# EAGLE board demeter_v24 (EAGLE 6.2)
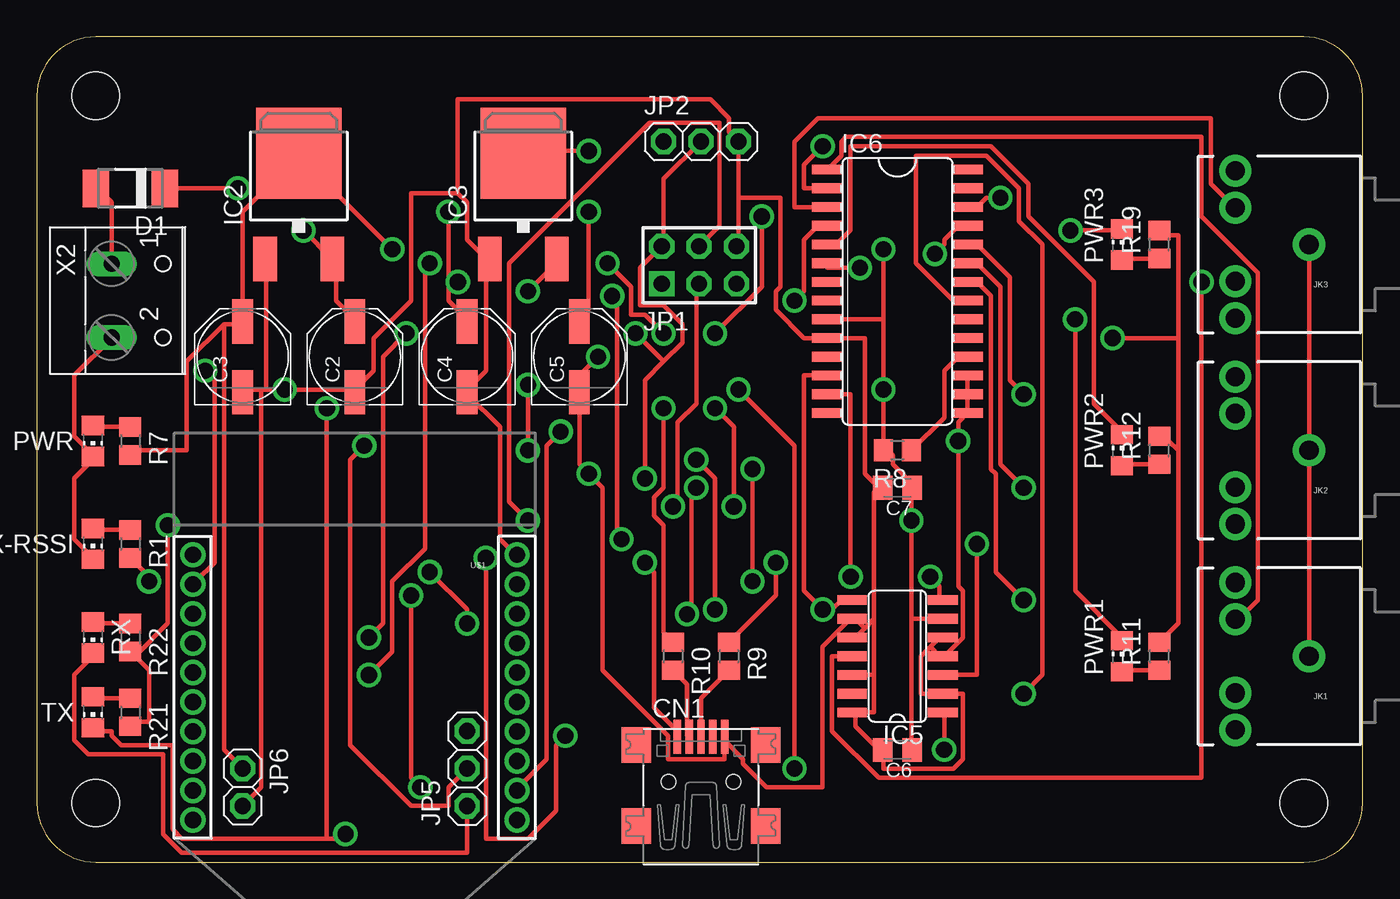
[diagram p0: board, top side]
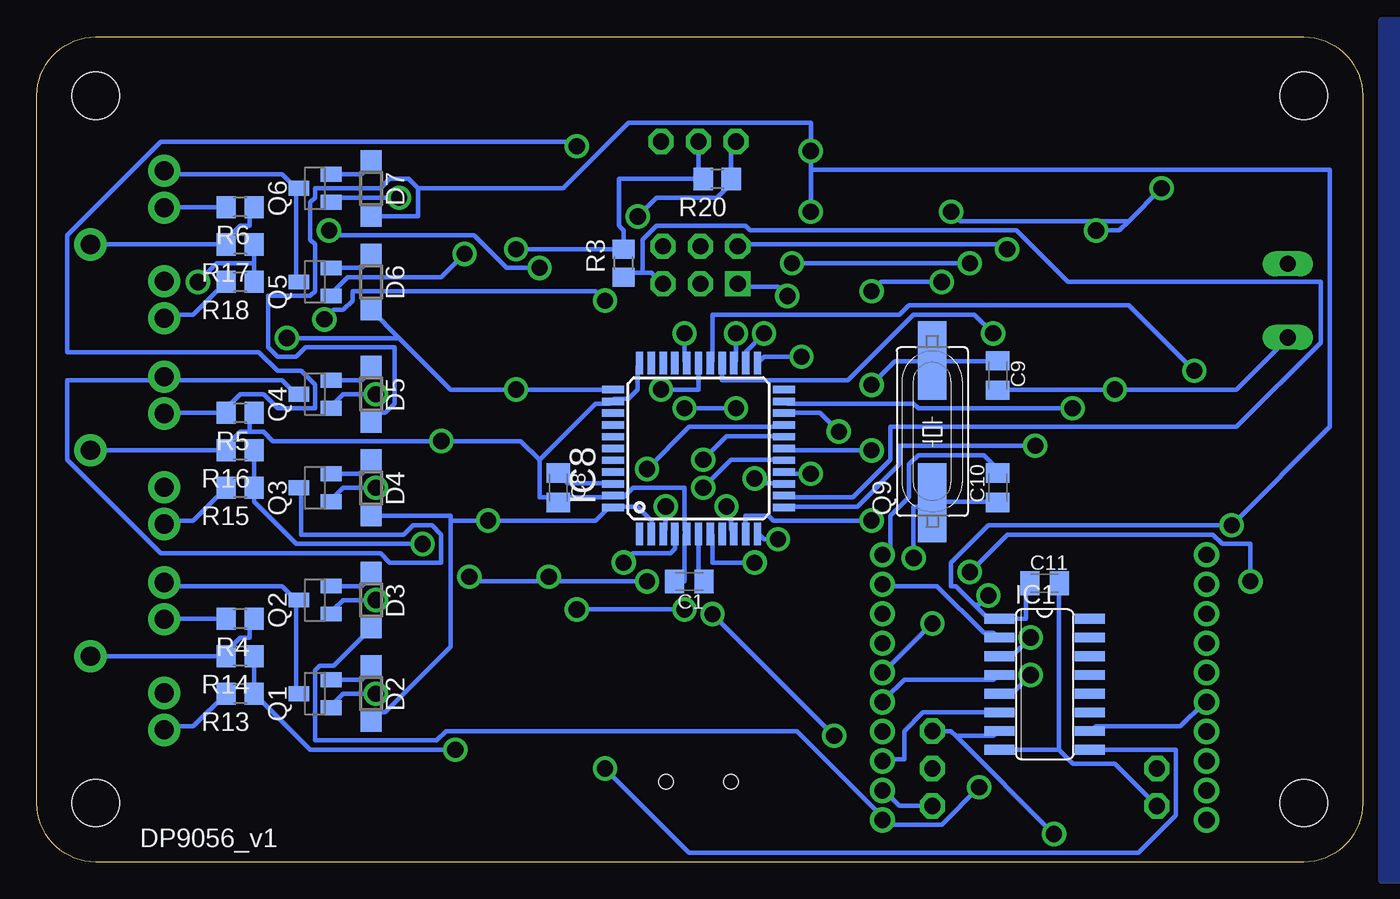
[diagram p1: board, bottom side, seen from below]

Size 90 x 56 mm. Coordinates in mm from the lower left corner, seen from the top.
Copper layers (1*16): Top 0.035mm / dielectric 1.5mm / Bottom 0.035mm
Design rules: minimum track width 12mil, minimum drill 1.1mm, track to track 8mil, track to pad 8mil, pad to pad 8mil, via to via 8mil, smd to smd 8mil, copper to edge 10mil, drill to drill 8mil, minimum pad ring 12mil, minimum via ring 10mil, stop-mask expansion 4mil, vias tented up to drill 25mil, thermal gap 10mil

## Footprints (pad centres in the part's own frame; a part is rotated, then mirrored left to right if it is on the bottom)
C0805K = smd 1.3 x 1.6: 1 -1,0; 2 1,0
PANASONIC_D = smd 3 x 1.4: + 2.4,0; - -2.4,0
USB-MINIB = smd 0.5 x 2.308: D+ 0,4.064; D- -0.8,4.064; GND 1.6,4.064; ID 0.8,4.064; VBUS -1.6,4.064 | smd 2 x 2.4: GND1 -4.4,-2; GND2 -4.4,3.5; GND3 4.4,3.5; GND4 4.4,-2 | hole 1: -2.2,1; 2.2,1
DO-214AC = smd 1.778 x 2.54: A 2.342,0; C -2.342,0
SOD123 = smd 1.4 x 1.4: A 1.9,0; C -1.9,0
SO16 = smd 0.66 x 2.032: 1 -4.445,-3.073; 2 -3.175,-3.073; 3 -1.905,-3.073; 4 -0.635,-3.073; 5 0.635,-3.073; 6 1.905,-3.073; 7 3.175,-3.073; 8 4.445,-3.073; 9 4.445,3.073; 10 3.175,3.073; 11 1.905,3.073; 12 0.635,3.073; 13 -0.635,3.073; 14 -1.905,3.073; 15 -3.175,3.073; 16 -4.445,3.073
DPACK = smd 1.6 x 3: 1 -2.28,-4.8; 3 2.28,-4.8 | smd 5.8 x 6.2: 4 0,2.38
SO14 = smd 2.032 x 0.66: 1 -3.073,3.81; 2 -3.073,2.54; 3 -3.073,1.27; 4 -3.073,0; 5 -3.073,-1.27; 6 -3.073,-2.54; 7 -3.073,-3.81; 8 3.073,-3.81; 9 3.073,-2.54; 10 3.073,-1.27; 11 3.073,0; 12 3.073,1.27; 13 3.073,2.54; 14 3.073,3.81
SO28W = smd 0.66 x 2.032: 1 -7.62,-4.78; 2 -6.35,-4.78; 3 -5.08,-4.78; 4 -3.81,-4.78; 5 -2.54,-4.78; 6 -1.27,-4.78; 7 0,-4.78; 8 1.27,-4.78; 9 2.54,-4.78; 10 3.81,-4.78; 11 5.08,-4.78; 12 6.35,-4.78; 13 7.62,-4.78; 14 8.89,-4.78; 15 8.89,4.78; 16 7.62,4.78; 17 6.35,4.78; 18 5.08,4.78; 19 3.81,4.78; 20 2.54,4.78; 21 1.27,4.78; 22 0,4.78; 23 -1.27,4.78; 24 -2.54,4.78; 25 -3.81,4.78; 26 -5.08,4.78; 27 -6.35,4.78; 28 -7.62,4.78
TQFP44 = smd 1.5 x 0.5: 1 -5.8,4; 2 -5.8,3.2; 3 -5.8,2.4; 4 -5.8,1.6; 5 -5.8,0.8; 6 -5.8,0; 7 -5.8,-0.8; 8 -5.8,-1.6; 9 -5.8,-2.4; 10 -5.8,-3.2; 11 -5.8,-4; 23 5.8,-4; 24 5.8,-3.2; 25 5.8,-2.4; 26 5.8,-1.6; 27 5.8,-0.8; 28 5.8,0; 29 5.8,0.8; 30 5.8,1.6; 31 5.8,2.4; 32 5.8,3.2; 33 5.8,4 | smd 0.5 x 1.5: 12 -4,-5.8; 13 -3.2,-5.8; 14 -2.4,-5.8; 15 -1.6,-5.8; 16 -0.8,-5.8; 17 0,-5.8; 18 0.8,-5.8; 19 1.6,-5.8; 20 2.4,-5.8; 21 3.2,-5.8; 22 4,-5.8; 34 4,5.8; 35 3.2,5.8; 36 2.4,5.8; 37 1.6,5.8; 38 0.8,5.8; 39 0,5.8; 40 -0.8,5.8; 41 -1.6,5.8; 42 -2.4,5.8; 43 -3.2,5.8; 44 -4,5.8
AUDIO-JACK = drill 1.3 pad 2.184: RING 5,5; RSH 5,2.5; SLEEVE 0,0; TIP 5,-5; TSH 5,-2.5
AVR-ISP-6 = drill 1.1 square: 1 -2.54,-1.27 | drill 1.1 octagon: 2 -2.54,1.27; 3 0,-1.27; 4 0,1.27; 5 2.54,-1.27; 6 2.54,1.27
1X03 = drill 1.1 octagon: 1 -2.54,0; 2 0,0; 3 2.54,0
1X02 = drill 1.1 octagon: 1 -1.27,0; 2 1.27,0
CHIP-LED0805 = smd 1.5 x 1.3: A 0,-1.05; C 0,1.05
SOT23 = smd 1 x 1.4: 1 -0.95,-1.1; 2 0.95,-1.1; 3 0,1.1
HC49UP = smd 5.334 x 1.93: 1 -4.826,0; 2 4.826,0
R0805 = smd 1.3 x 1.5: 1 -0.95,0; 2 0.95,0
XBEE-1 = drill 1.1: 1 -11,20; 2 -11,18; 3 -11,16; 4 -11,14; 5 -11,12; 6 -11,10; 7 -11,8; 8 -11,6; 9 -11,4; 10 -11,2; 11 11,2; 12 11,4; 13 11,6; 14 11,8; 15 11,10; 16 11,12; 17 11,14; 18 11,16; 19 11,18; 20 11,20
DP9056_V1 = hole 3.2: 4,4; 86,4; 86,52; 4,52
W237-102 = drill 1.1 long: 1 -2.5,-1.27; 2 2.5,-1.27

## Placement (x,y rotation side)
C1  1uF  [C0805K]  45.72,19.05 180 bottom
C2  22uF  [PANASONIC_D]  21.59,34.29 90 top
C3  100uF  [PANASONIC_D]  13.97,34.29 90 top
C4  22uF  [PANASONIC_D]  29.21,34.29 90 top
C5  100uF  [PANASONIC_D]  36.83,34.29 90 top
C6  100nF  [C0805K]  58.42,7.62 180 top
C7  100nF  [C0805K]  58.42,25.4 180 top
C8  100nF  [C0805K]  54.61,25.4 270 bottom
C9  22pF  [C0805K]  24.77,33.02 270 bottom
C10  22pF  [C0805K]  24.77,25.4 90 bottom
C11  100nF  [C0805K]  21.59,18.92 0 bottom
CN1  [USB-MINIB]  45.08,4.45 0 top
D1  S1M  [DO-214AC]  6.35,45.72 180 top
D2  [SOD123]  67.31,11.43 270 bottom
D3  [SOD123]  67.31,17.78 270 bottom
D4  [SOD123]  67.31,25.4 270 bottom
D5  [SOD123]  67.31,31.75 270 bottom
D6  [SOD123]  67.31,39.37 270 bottom
D7  [SOD123]  67.31,45.72 270 bottom
IC1  4050  [SO16]  21.59,12.07 270 bottom
IC2  LM1117-5.0  [DPACK]  17.78,45.72 0 top
IC3  LM1117-3.3  [DPACK]  33.02,45.72 0 top
IC5  MCP3424  [SO14]  58.42,13.97 180 top
IC6  MCP23017SO  [SO28W]  58.42,39.37 270 top
IC8  ATMEGA32U4-AU  [TQFP44]  45.08,28.07 90 bottom
JK1  [AUDIO-JACK]  86.36,13.97 180 top
JK2  [AUDIO-JACK]  86.36,27.94 180 top
JK3  [AUDIO-JACK]  86.36,41.91 180 top
JP1  AVR-ISP-6  [AVR-ISP-6]  44.96,40.51 0 top
JP2  [1X03]  45.08,48.89 0 top
JP5  [1X03]  29.21,6.35 90 top
JP6  [1X02]  13.97,5.08 270 top
PWR  [CHIP-LED0805]  3.81,28.57 180 top
PWR1  [CHIP-LED0805]  73.66,13.97 0 top
PWR2  [CHIP-LED0805]  73.66,27.94 0 top
PWR3  [CHIP-LED0805]  73.66,41.91 0 top
Q1  IRLML6402  [SOT23]  71.12,11.43 90 bottom
Q2  [SOT23]  71.12,17.78 90 bottom
Q3  IRLML6402  [SOT23]  71.12,25.4 90 bottom
Q4  [SOT23]  71.12,31.75 90 bottom
Q5  IRLML6402  [SOT23]  71.12,39.37 90 bottom
Q6  [SOT23]  71.12,45.72 90 bottom
Q9  [HC49UP]  29.21,29.21 90 bottom
R1  [R0805]  6.35,21.59 270 top
R3  [R0805]  50.16,40.64 90 bottom
R4  [R0805]  76.2,16.51 180 bottom
R5  [R0805]  76.2,30.48 180 bottom
R6  [R0805]  76.2,44.45 180 bottom
R7  [R0805]  6.35,28.57 270 top
R8  [R0805]  58.42,27.94 180 top
R9  22  [R0805]  46.99,13.97 270 top
R10  22  [R0805]  43.18,13.97 270 top
R11  [R0805]  76.2,13.97 90 top
R12  [R0805]  76.2,27.94 90 top
R13  [R0805]  76.2,11.43 180 bottom
R14  [R0805]  76.2,13.97 180 bottom
R15  [R0805]  76.2,25.4 180 bottom
R16  [R0805]  76.2,27.94 180 bottom
R17  [R0805]  76.2,41.91 180 bottom
R18  [R0805]  76.2,39.37 180 bottom
R19  [R0805]  76.2,41.91 90 top
R20  10k  [R0805]  43.81,46.35 180 bottom
R21  [R0805]  6.35,10.16 270 top
R22  [R0805]  6.35,15.24 270 top
RX  [CHIP-LED0805]  3.81,15.24 180 top
TX  [CHIP-LED0805]  3.81,10.16 180 top
U$1  XBEE-1B1  [XBEE-1]  21.59,22.86 180 top
U$6  [DP9056_V1]  0,0 0 top
X2  [W237-102]  6.35,38.1 270 top
X-RSSI  [CHIP-LED0805]  3.81,21.59 180 top

## Library data of the parts
C1-C11 CN1 D1-D7 IC1-IC3 IC8 JK1-JK3 JP1 JP2 JP5 JP6 PWR PWR1-PWR3 Q1-Q6 Q9 R1 R3-R22 RX TX U$1 U$6 X2 X-RSSI = mark_2
IC5 = mark_2; MPN: MCP3424-E/SL; OC_FARNELL: 1630424; OC_NEWARK: 54M4871; PACKAGE: SOIC-14; SUPPLIER: Microchip
IC6 = mark_2; MF: MICROCHIP; MPN: MCP23017-E/SO; OC_FARNELL: 1332087; OC_NEWARK: 31K2958

## Nets
+3V3: C5.+ C11.1 D3.A D5.A D7.A IC1.1 IC3.4 R21.2 R22.2 U$1.1
+5V: C3.+ C6.1 C7.1 D2.A D4.A D6.A IC2.4 IC5.6 IC6.9 IC8.2 IC8.14 IC8.24 IC8.34 IC8.44 JP1.2 JP2.2 JP6.1 R3.2 R7.2 R8.2 R11.2 R12.2 R19.2 R20.2
+12V: C2.+ C4.+ D1.C IC2.3 IC3.3
CH1: IC5.1 R13.1 R14.1
CH2: IC5.3 R15.1 R16.1
CH3: IC5.11 R17.1 R18.1
CTS: IC8.27 U$1.12
D+: IC8.4 R9.1
D-: IC8.3 R10.1
DATA: IC8.29 JP2.1 R20.1
DTR: IC1.3 IC8.26
EN: IC8.12 JP5.2
EN1-3: IC6.22 Q2.1
EN1-5: IC6.21 Q1.1
EN2-3: IC6.24 Q4.1
EN2-5: IC6.23 Q3.1
EN3-3: IC6.26 Q6.1
EN3-5: IC6.25 Q5.1
GND: C1.2 C2.- C3.- C4.- C5.- C6.2 C7.2 C8.2 C9.2 C10.2 C11.2 CN1.GND IC1.8 IC2.1 IC3.1 IC5.2 IC5.4 IC5.5 IC5.9 IC5.10 IC5.12 IC5.14 IC6.10 IC6.15 IC6.16 IC6.17 IC8.5 IC8.15 IC8.23 IC8.33 IC8.35 IC8.43 JK1.SLEEVE JK2.SLEEVE JK3.SLEEVE JP1.6 JP2.3 JP6.2 PWR.C R4.1 R5.1 R6.1 R14.2 R16.2 R17.2 U$1.10 X2.2 X-RSSI.C
MISO: IC8.11 JP1.1
MOSI: IC8.10 JP1.4
N$1: D1.A X2.1
N$2: PWR.A R7.1
N$3: IC1.6 U$1.3
N$4: IC1.4 U$1.5
N$5: PWR1.A R11.1
N$6: R1.1 X-RSSI.A
N$7: IC1.2 U$1.9
N$8: IC1.10 U$1.16
N$11: IC6.18 R8.1
N$12: JK1.TIP Q1.3 Q2.3
N$13: D2.C Q1.2
N$14: D3.C Q2.2
N$15: JK2.TIP Q3.3 Q4.3
N$16: D4.C Q3.2
N$17: D5.C Q4.2
N$18: JK3.TIP Q5.3 Q6.3
N$19: D6.C Q5.2
N$20: D7.C Q6.2
N$22: PWR2.A R12.1
N$23: PWR3.A R19.1
N$24: C1.1 IC8.6
N$25: C8.1 IC8.42
N$26: C9.1 IC8.17 Q9.2
N$27: C10.1 IC8.16 Q9.1
N$28: CN1.D+ R9.2
N$29: CN1.D- R10.2
N$30: JK1.RING R13.2
N$31: IC6.6 PWR3.C
N$32: JK2.RING R15.2
N$33: IC6.5 PWR2.C
N$34: JK3.RING R18.2
N$35: IC6.4 PWR1.C
N$36: R21.1 TX.A
N$37: R22.1 RX.A
RESET: IC1.5 IC8.25
RSSI: R1.2 U$1.6
RST: IC8.13 JP1.5 R3.1
RTS: IC1.9 IC8.28
RX: IC8.20 JP5.1 RX.C U$1.2
RXLED: IC8.8
SCK: IC8.9 JP1.3
SCL: IC5.8 IC6.12 IC8.18
SDA: IC5.7 IC6.13 IC8.19
SN1: IC6.1 JK1.TSH R4.2
SN2: IC6.2 JK2.TSH R5.2
SN3: IC6.3 JK3.TSH R6.2
TX: IC1.7 IC8.21 JP5.3 TX.C
TXLED: IC8.22
VBUS: CN1.VBUS IC8.7

## Tracks (layer width: path | path; a pad name or v marks a point on that pad's centre or on a via)
+3V3  (via drill 1.1)
  Top 0.305: 6.67,13.97 R22.2 6.67,13.97 | 6.67,13.97 7.62,13.02 7.62,9.53 6.35,9.53 R21.2 | 6.67,13.97 8.89,16.19 v8.89,22.86 | v37.46,44.13 37.46,37.46 36.83,36.83 C5.+ | v37.46,48.26 33.02,48.26 IC3.4 | v26.04,5.08 25.4,5.71 v25.4,18.1
  Bottom 0.305: D3.A 69.85,13.34 70.8,13.34 71.12,13.02 71.12,8.26 62.87,8.26 62.23,8.89 38.42,8.89 32.7,3.18 U$1.1 32.38,2.86 32.07,2.54 28.57,2.54 v26.04,5.08 | C11.1 22.86,18.73 22.86,16.51 IC1.1 25.4,16.51 26.35,17.46 | 26.35,17.46 27.62,18.73 27.94,18.73 27.94,20.32 25.4,22.86 v8.89,22.86 2.22,29.53 2.22,46.99 37.46,46.99 | 64.14,45.72 64.77,46.35 66.04,46.35 66.67,45.72 71.12,45.72 71.12,45.08 71.44,44.77 71.44,42.23 71.12,41.91 71.12,38.73 71.44,38.42 74.3,38.42 74.3,34.92 73.66,34.29 72.39,34.29 71.76,34.92 65.72,34.92 65.72,31.11 66.36,30.48 66.99,30.48 67.31,30.16 D5.A | 64.14,45.72 64.14,43.81 D7.A | 37.46,46.99 v37.46,48.26 37.46,50.16 49.85,50.16 54.29,45.72 64.14,45.72 | 37.46,46.99 v37.46,44.13 | v25.4,18.1 26.04,17.46 26.35,17.46
+5V  (via drill 1.1)
  Top 0.305: 12.7,36.51 10.16,33.97 10.16,27.94 6.35,27.94 R7.2 | 12.7,36.51 13.97,36.51 C3.+ 13.97,44.13 17.78,47.94 | JP6.1 12.7,7.62 12.7,36.51 | v41.27,26.04 41.27,32.7 42.54,33.97 | 42.54,33.97 43.81,35.24 43.81,36.51 42.54,37.78 40.96,37.78 40.96,40.32 JP1.2 42.54,41.91 42.54,46.35 JP2.2 | 42.54,33.97 v40.64,35.88 | 77.47,27.94 77.47,16.19 R11.2 | 77.47,27.94 76.84,28.57 76.2,28.57 R12.2 | 77.47,27.94 77.47,35.56 | 77.47,35.56 77.47,42.54 76.2,42.54 R19.2 | 59.37,25.4 59.37,25.72 58.1,26.99 58.1,27.62 57.78,27.94 R8.2 v57.47,32.07 57.47,36.83 | 59.37,25.4 v59.37,23.18 59.37,16.51 | 59.37,16.51 59.37,7.62 C6.1 | 59.37,25.4 C7.1 | 57.47,36.83 IC6.9 | 59.37,16.51 IC5.6 | v73.03,35.56 77.47,35.56 | 57.47,36.83 v57.47,41.59 | v24.13,41.59 17.78,47.94 | 17.78,47.94 IC2.4
  Bottom 0.305: R3.2 50.16,42.86 50.48,43.18 50.48,46.35 45.08,46.35 | 45.08,46.35 R20.2 | 45.08,46.35 JP2.2 | v41.27,26.04 40.96,25.72 39.37,25.72 IC8.14 | v40.64,35.88 41.91,34.61 41.91,33.97 IC8.24 | IC8.2 48.26,22.54 48.26,23.18 49.21,24.13 50.8,24.13 IC8.44 51.12,24.13 52.07,23.18 v59.37,23.18 61.91,23.18 | 61.91,23.18 61.91,23.5 D4.A | 61.91,23.18 61.91,14.61 66.36,10.16 66.99,10.16 67.31,9.84 D2.A | 65.41,35.56 61.91,32.07 v57.47,32.07 51.12,32.07 IC8.34 | 65.41,35.56 D6.A | 65.41,35.56 v73.03,35.56 | v57.47,41.59 R3.2 | R3.2 | v24.13,41.59 24.45,41.91 42.23,41.91 JP1.2
+12V  (via drill 1.1)
  Top 0.305: v13.65,45.72 D1.C | v18.1,42.86 20,40.96 IC2.3 20.32,40.64 20.32,38.1 21.59,36.83 C2.+ | v27.94,44.13 27.94,39.37 | 27.94,39.37 27.94,38.1 29.21,36.83 C4.+ | v33.34,38.73 35.24,40.64 IC3.3 | 27.94,39.37 v28.57,39.37
  Bottom 0.305: 15.88,43.5 16.51,42.86 v18.1,42.86 | 15.88,43.5 v13.65,45.72 | v27.94,44.13 27.3,43.5 15.88,43.5 | v33.34,38.73 32.7,39.37 v28.57,39.37
CH1  (via drill 1.1)
  Top 0.305: v61.59,7.62 61.59,10.16 IC5.1
  Bottom 0.305: R13.1 R14.1 | v61.59,7.62 71.44,7.62 R13.1 | R13.1
CH2  (via drill 1.1)
  Top 0.305: IC5.3 63.82,12.7 v63.82,21.59
  Bottom 0.305: R15.1 R16.1 | v63.82,21.59 72.39,21.59 75.25,24.45 R15.1 | R15.1
CH3  (via drill 1.1)
  Top 0.305: IC5.11 53.97,13.97 53.97,8.89 57.15,5.71 79.06,5.71 v79.06,39.37
  Bottom 0.305: 75.25,40.64 R17.1 | 75.25,40.64 R18.1 | v79.06,39.37 77.79,40.64 75.25,40.64
CTS  (via drill 1.1)
  Top 0.305: v11.43,33.34 12.07,32.7 12.07,20.32 10.79,19.05 U$1.12
  Bottom 0.305: v11.43,33.34 15.88,37.78 30.8,37.78 31.43,37.15 44.13,37.15 44.13,33.97 IC8.27
D+  (via drill 1.1)
  Top 0.305: v50.16,20.32 50.16,18.1 R9.1
  Bottom 0.305: v50.16,20.32 49.53,20.96 46.99,20.96 46.67,21.27 46.67,22.23 IC8.4
D-  (via drill 1.1)
  Top 0.305: v42.54,30.8 42.54,25.4 41.91,24.77 41.91,23.5 42.54,22.86 42.54,15.56 R10.1 | v46.04,30.8 47.31,29.53 v47.31,24.13
  Bottom 0.305: v46.04,30.8 v42.54,30.8 | v47.31,24.13 47.31,22.54 IC8.3
DATA  (via drill 1.1)
  Top 0.305: v46.04,35.88 49.21,39.05 v49.21,43.81
  Bottom 0.305: JP2.1 42.86,48.89 R20.1 43.18,46.35 43.18,45.72 43.81,45.08 47.94,45.08 v49.21,43.81 | v46.04,35.88 46.04,33.97 IC8.29
DTR  (via drill 1.1)
  Top 0.305: v25.08,35.88 23.5,34.29 23.5,16.19 v22.54,15.24
  Bottom 0.305: v25.08,35.88 26.35,37.15 30.48,37.15 34.92,32.7 43.5,32.7 43.5,33.65 IC8.26 | v22.54,15.24 23.81,13.97 IC1.3
EN  (via drill 1.1)
  Top 0.305: v22.23,28.26 21.27,27.3 21.27,7.94 25.4,3.81 27.94,3.81 27.94,5.08 JP5.2
  Bottom 0.305: v22.23,28.26 31.43,28.26 31.43,26.99 34.29,24.13 39.05,24.13 IC8.12
EN1-3  (via drill 1.1)
  Top 0.305: v66.99,17.78 65.09,19.68 65.09,26.35 64.77,26.67 64.77,38.42 63.82,39.37 IC6.22
  Bottom 0.305: v66.99,17.78 69.22,17.78 69.85,17.14 Q2.1
EN1-5  (via drill 1.1)
  Top 0.305: v66.99,11.43 68.26,12.7 68.26,41.91 66.67,43.5 66.67,45.72 64.45,47.94 59.69,47.94 59.69,40.64 62.23,38.1 IC6.21
  Bottom 0.305: v66.99,11.43 69.22,11.43 69.85,10.79 Q1.1
EN2-3  (via drill 1.1)
  Top 0.305: v66.99,31.75 66.04,32.7 66.04,39.69 63.82,41.91 IC6.24
  Bottom 0.305: v66.99,31.75 69.22,31.75 69.85,31.11 Q4.1
EN2-5  (via drill 1.1)
  Top 0.305: v66.99,25.4 65.41,26.99 65.41,39.05 63.82,40.64 IC6.23
  Bottom 0.305: v66.99,25.4 69.22,25.4 69.85,24.77 Q3.1
EN3-3  (via drill 1.1)
  Top 0.305: v65.41,45.08 64.45,45.08 63.82,44.45 IC6.26
  Bottom 0.305: v65.41,45.08 69.85,45.08 Q6.1
EN3-5  (via drill 1.1)
  Top 0.305: v60.96,41.27 61.59,41.91 61.59,42.23 62.55,43.18 IC6.25
  Bottom 0.305: v60.96,41.27 62.55,39.69 68.9,39.69 69.85,38.73 Q5.1
GND  (via drill 1.1)
  Top 0.305: JK1.SLEEVE JK2.SLEEVE JK3.SLEEVE | 63.18,31.75 63.18,30.48 | 63.18,31.75 63.18,33.02 IC6.17 | 63.18,31.75 IC6.16 | 60.64,14.61 61.28,15.24 IC5.5 | 60.64,14.61 60.01,13.97 60.01,11.43 IC5.2 62.87,11.43 62.87,6.99 62.23,6.35 57.47,6.35 57.47,7.62 C6.2 57.15,7.62 55.56,9.21 55.56,10.16 | 60.64,14.61 61.28,13.97 IC5.4 61.59,13.97 62.87,15.24 62.87,18.41 62.55,18.73 v62.55,28.57 62.55,29.84 63.18,30.48 | 63.18,30.48 IC6.15 | 47.62,45.08 JP2.3 46.99,49.53 46.99,50.48 45.72,51.75 28.57,51.75 28.57,45.4 | 47.62,45.08 47.62,41.91 JP1.6 | v38.1,34.29 36.83,33.02 C5.- 36.83,26.99 v37.46,26.35 38.42,25.4 38.42,13.02 42.86,8.57 42.86,6.99 46.67,6.99 46.67,8.26 | 57.15,25.4 56.83,25.08 56.83,16.51 | 56.2,15.88 55.56,15.24 IC5.10 | 56.2,15.88 56.83,16.51 | 56.83,12.7 IC5.12 | 56.83,16.51 56.83,12.7 | 56.2,15.88 55.56,16.51 IC5.9 55.24,16.51 53.34,14.61 53.34,5.08 49.53,5.08 47.94,6.67 47.94,6.99 46.67,8.26 | 57.15,25.4 56.2,26.35 56.2,35.56 IC6.10 52.07,35.56 50.16,37.46 50.16,38.73 50.48,39.05 50.48,45.08 47.62,45.08 | 57.15,25.4 C7.2 | 55.56,10.16 56.83,10.16 56.83,12.7 | 55.56,10.16 IC5.14 | 46.67,8.26 CN1.GND | X-RSSI.C 3.81,20.64 2.54,21.91 2.54,26.04 3.81,27.3 PWR.C 3.81,27.62 2.54,28.89 2.54,33.02 5.08,35.56 X2.2 | U$1.10 32.38,20.96 31.43,21.91 31.43,29.53 29.21,31.75 C4.- 29.21,32.07 30.48,33.34 30.48,40.64 IC3.1 30.48,40.96 29.21,42.23 29.21,44.77 28.57,45.4 | 21.59,32.07 v16.83,32.07 15.56,32.07 | 15.56,32.07 15.24,32.07 | 15.24,32.07 13.97,32.07 C3.- | 15.56,32.07 15.56,40.64 IC2.1 | 15.24,32.07 15.24,5.08 JP6.2 | 28.57,45.4 25.4,45.4 25.4,38.1 22.86,35.56 22.86,33.34 21.59,32.07
  Top 0.305: 21.59,32.07 C2.-
  Bottom 0.305: IC8.33 49.21,33.65 49.21,32.07 49.85,31.43 50.8,31.43 IC8.35 51.12,31.11 52.07,31.11 55.88,27.3 | C1.2 46.04,19.05 46.04,22.23 IC8.5 46.04,22.54 46.04,25.4 49.53,25.4 50.16,24.77 50.8,24.77 IC8.43 51.12,24.77 54.29,24.77 | 54.29,24.77 54.61,24.45 C8.2 54.29,24.77 | 55.88,27.3 55.88,24.77 54.29,24.77 | JK3.SLEEVE 77.47,41.91 | 77.47,41.91 76.2,43.18 75.56,43.18 75.56,44.45 R6.1 | 77.47,41.91 R17.2 | JK1.SLEEVE 77.47,13.97 | 77.47,13.97 76.2,15.24 75.56,15.24 75.56,16.51 R4.1 | 77.47,13.97 R14.2 | JK2.SLEEVE 77.47,27.94 | 75.56,29.21 75.56,30.48 R5.1 | 75.56,29.21 76.2,29.21 77.47,27.94 | 77.47,27.94 R16.2 | 55.88,27.3 57.15,28.57 v62.55,28.57 73.98,28.57 74.61,29.21 75.56,29.21 | v37.46,26.35 39.05,26.35 IC8.15 | v38.1,34.29 40.64,34.29 40.96,33.97 IC8.23 | C9.2 24.77,32.07 v16.83,32.07 8.57,32.07 5.08,35.56 X2.2 | C10.2 24.77,26.67 25.72,27.62 30.16,27.62 30.8,26.99 30.8,24.77 32.07,23.5 32.07,20.96 32.38,20.96 U$1.10 | 20.64,7.62 20.64,18.73 C11.2 | IC1.8 20.64,7.62 | JP6.2 16.83,6.67 19.68,6.67 20.64,7.62
  pour Bottom (isolate 0.813): -1.27,57.15 -10.16,57.15 -10.16,-1.27 -1.27,-1.27
MISO  (via drill 1.1)
  Top 0.305: v39.69,21.91 39.37,22.23 39.37,38.1 v39.05,38.42
  Bottom 0.305: v39.69,21.91 40.64,21.91 40.96,22.23 IC8.11 | v39.05,38.42 39.69,39.05 42.23,39.05 JP1.1
MOSI  (via drill 1.1)
  Top 0.305: v33.34,23.18 32.07,24.45 32.07,40.64 41.59,50.16 46.35,50.16 46.35,43.18 JP1.4
  Bottom 0.305: v33.34,23.18 40,23.18 40.32,23.5 41.91,23.5 41.91,22.54 IC8.10
N$1
  Top 0.305: X2.1 5.08,44.77 4.13,45.72 D1.A
N$2
  Top 0.305: PWR.A 3.81,29.53 R7.1
N$3
  Bottom 0.305: IC1.6 29.84,10.16 31.11,8.89 31.11,6.99 32.38,6.99 U$1.3
N$4
  Bottom 0.305: IC1.4 24.77,12.7 25.08,12.38 31.11,12.38 32.38,11.11 U$1.5
N$5
  Top 0.305: PWR1.A 73.66,13.02 R11.1
N$6
  Top 0.305: X-RSSI.A 3.81,22.54 R1.1
N$7
  Bottom 0.305: IC1.2 24.77,15.24 25.08,15.56 25.72,15.56 28.89,18.73 32.38,18.73 U$1.9
N$8
  Bottom 0.305: IC1.10 18.41,8.89 18.1,9.21 12.38,9.21 10.79,10.79 U$1.16
N$11
  Top 0.305: IC6.18 62.55,34.29 61.59,33.34 61.59,30.16 R8.1
N$12
  Bottom 0.305: 72.39,17.78 72.39,11.43 Q1.3 | 72.39,17.78 73.34,18.73 81.28,18.73 JK1.TIP | 72.39,17.78 Q2.3
N$13
  Bottom 0.305: D2.C 67.31,13.02 67.95,12.38 69.85,12.38 Q1.2
N$14
  Bottom 0.305: D3.C 67.31,19.37 67.95,18.73 69.85,18.73 Q2.2
N$15
  Bottom 0.305: Q3.3 72.07,25.4 72.07,22.23 65.09,22.23 64.45,22.86 63.18,22.86 62.55,22.23 62.55,20.32 66.04,20.32 66.67,20.96 81.6,20.96 87.95,27.3 87.95,32.7 81.6,32.7 JK2.TIP 81.28,32.7 73.34,32.7 72.39,31.75 Q4.3
N$16
  Bottom 0.305: D4.C 67.31,26.99 67.95,26.35 69.85,26.35 Q3.2
N$17
  Bottom 0.305: D5.C 67.31,33.34 67.95,32.7 69.85,32.7 Q4.2
N$18
  Bottom 0.305: 72.39,45.72 72.39,39.37 Q5.3 | 72.39,45.72 73.34,46.67 81.28,46.67 JK3.TIP | 72.39,45.72 Q6.3
N$19
  Bottom 0.305: D6.C 67.31,40.96 67.95,40.32 69.85,40.32 Q5.2
N$20
  Bottom 0.305: D7.C 67.31,47.31 67.95,46.67 69.85,46.67 Q6.2
N$22
  Top 0.305: PWR2.A 73.66,26.99 R12.1
N$23
  Top 0.305: PWR3.A 73.66,40.96 R19.1
N$24
  Bottom 0.305: IC8.6 45.08,19.05 C1.1
N$25
  Bottom 0.305: IC8.42 51.12,25.72 53.97,25.72 54.61,26.35 C8.1
N$26  (via drill 1.1)
  Top 0.305: v33.34,32.38 v33.34,27.94
  Bottom 0.305: v33.34,27.94 39.05,27.94 IC8.17 | v33.34,32.38 31.75,33.97 29.21,33.97 | 29.21,33.97 24.77,33.97 C9.1 | 29.21,33.97 Q9.2
N$27  (via drill 1.1)
  Top 0.305: v44.77,25.4 44.45,25.08 44.45,17.14 v44.13,16.83 | v35.88,8.57 35.24,7.94 35.24,3.49 33.34,1.59 30.48,1.59 v30.48,20.64
  Bottom 0.305: v44.77,25.4 42.86,27.3 39.37,27.3 IC8.16 | v35.88,8.57 v44.13,16.83 | v30.48,20.64 30.48,24.13 29.21,24.13 Q9.1 29.21,24.45 24.77,24.45 C10.1
N$28
  Top 0.305: CN1.D+ 45.08,11.11 R9.2
N$29
  Top 0.305: R10.2 44.13,12.07 44.13,8.57 CN1.D-
N$30
  Bottom 0.305: R13.2 79.38,9.21 81.28,9.21 JK1.RING
N$31  (via drill 1.1)
  Top 0.305: v70.17,42.86 73.66,42.86 PWR3.C | v55.88,40.32 53.66,40.32 53.66,40.64 IC6.6
  Bottom 0.305: v70.17,42.86 69.85,42.54 60.32,42.54 58.1,40.32 v55.88,40.32
N$32
  Bottom 0.305: R15.2 79.38,23.18 81.28,23.18 JK2.RING
N$33
  Top 0.305: IC6.5 54.29,41.91 55.24,42.86 55.24,48.58 64.77,48.58 67.31,46.04 67.31,43.81 71.76,39.37 71.76,31.11 73.66,29.21 PWR2.C
N$34
  Bottom 0.305: R18.2 79.38,37.15 81.28,37.15 JK3.RING
N$35  (via drill 1.1)
  Top 0.305: v70.48,36.83 70.48,18.41 73.66,15.24 PWR1.C | v51.43,38.1 52.07,38.73 52.07,42.23 53.02,43.18 IC6.4
  Bottom 0.305: v70.48,36.83 69.85,37.46 69.22,37.46 68.58,38.1 68.58,38.73 52.07,38.73 v51.43,38.1
N$36
  Top 0.305: TX.A 3.81,11.11 R21.1
N$37
  Top 0.305: RX.A 3.81,16.19 R22.1
RESET  (via drill 1.1)
  Top 0.305: v42.54,35.88 41.27,37.15 40.32,37.15 40.32,39.05 v38.73,40.64 | v26.67,40.64 26.35,40.32 26.35,21.27 24.13,19.05 24.13,14.29 v22.54,12.7
  Bottom 0.305: v42.54,35.88 42.54,33.97 IC8.25 | v26.67,40.64 v38.73,40.64 | v22.54,12.7 23.81,11.43 IC1.5
RSSI  (via drill 1.1)
  Top 0.305: v7.62,19.05 7.62,19.37 R1.2 | v26.67,19.68 29.21,17.14 v29.21,16.19
  Bottom 0.305: v7.62,19.05 7.62,21.59 9.53,21.59 10.16,22.23 24.13,22.23 v26.67,19.68 | v29.21,16.19 32.38,13.02 U$1.6
RST
  Bottom 0.305: 48.89,40 48.89,42.23 47.94,43.18 41.91,43.18 41.59,42.86 23.5,42.86 20,39.37 2.86,39.37 2.86,35.24 8.57,29.53 32.07,29.53 32.07,27.3 34.61,24.77 39.05,24.77 IC8.13 | 48.89,40 50.16,40 R3.1 | JP1.5 48.26,40 48.89,40
RTS  (via drill 1.1)
  Top 0.305: v47.62,32.07 51.43,28.26 v51.43,6.35
  Bottom 0.305: IC8.28 45.08,32.07 v47.62,32.07 | v51.43,6.35 45.72,0.64 15.24,0.64 12.7,3.18 12.7,7.62 IC1.9
RX  (via drill 1.1)
  Top 0.305: v35.56,29.21 34.61,28.26 34.61,6.99 32.7,5.08 U$1.2 | JP5.1 29.21,0.64 9.84,0.64 8.57,1.9 8.57,7.3 3.49,7.3 2.54,8.26 2.54,12.7 3.81,13.97 RX.C
  Bottom 0.305: v35.56,29.21 36.83,30.48 39.05,30.48 IC8.20 | JP5.1 31.43,3.81 32.38,4.76 U$1.2
SCK  (via drill 1.1)
  Top 0.305: v43.18,24.13 43.5,24.45 43.5,29.84 44.77,31.11 44.77,39.05 JP1.3
  Bottom 0.305: v43.18,24.13 42.86,24.13 42.86,22.54 IC8.9
SCL  (via drill 1.1)
  Top 0.305: v44.77,27.3 46.04,26.04 v46.04,17.14 | IC5.8 54.61,17.78 53.97,17.14 v53.34,17.14 52.07,18.41 52.07,33.02 IC6.12
  Bottom 0.305: v44.77,27.3 43.18,28.89 39.37,28.89 IC8.18 | v53.34,17.14 v46.04,17.14
SDA  (via drill 1.1)
  Top 0.305: v48.58,19.05 v48.58,26.67 | v60.64,19.37 61.28,18.73 61.28,17.78 IC5.7 | IC6.13 55.24,31.75 v55.24,19.37
  Bottom 0.305: v48.58,26.67 45.72,29.53 39.37,29.53 IC8.19 | 55.24,19.05 60.32,19.05 v60.64,19.37 | 55.24,19.05 v48.58,19.05 | 55.24,19.05 v55.24,19.37
SN1
  Top 0.305: IC6.1 53.66,46.99 54.61,47.94 54.61,48.89 54.93,49.21 79.06,49.21 79.06,43.81 82.87,40 82.87,17.78 81.6,16.51 JK1.TSH
  Bottom 0.305: R4.2 81.28,16.51 JK1.TSH
SN2  (via drill 1.1)
  Top 0.305: IC6.2 52.07,45.72 52.07,47.31 v53.34,48.58
  Bottom 0.305: 77.47,30.48 81.28,30.48 JK2.TSH | v53.34,48.58 53.66,48.89 81.6,48.89 87.95,42.54 87.95,34.61 74.93,34.61 73.66,33.34 72.07,33.34 71.12,32.38 71.12,30.8 73.66,30.8 74.61,31.75 76.2,31.75 77.47,30.48 | 77.47,30.48 R5.2
SN3
  Top 0.305: IC6.3 51.43,44.45 51.43,48.89 53.02,50.48 79.69,50.48 79.69,46.04 81.28,44.45 JK3.TSH
  Bottom 0.305: R6.2 81.28,44.45 JK3.TSH
TX  (via drill 1.1)
  Top 0.305: 19.68,1.59 20.96,1.59 v20.96,1.9 | 19.68,1.59 9.84,1.59 9.21,2.22 9.21,7.94 5.71,7.94 5.08,8.57 5.08,8.89 3.81,8.89 TX.C | 19.68,1.59 v19.68,30.8
  Bottom 0.305: 27.62,8.57 27.94,8.89 JP5.3 | 27.62,8.57 v20.96,1.9 | v19.68,30.8 30.16,30.8 30.48,31.11 39.05,31.11 IC8.21 | 27.62,8.57 25.08,8.57 24.77,8.89 IC1.7
VBUS  (via drill 1.1)
  Top 0.305: v41.27,20.32 41.91,19.68 41.91,10.48 43.5,8.89 43.5,8.57 CN1.VBUS
  Bottom 0.305: v41.27,20.32 44.13,20.32 44.13,22.23 IC8.7